# Allegro board Accelerometer_v1.0.brd
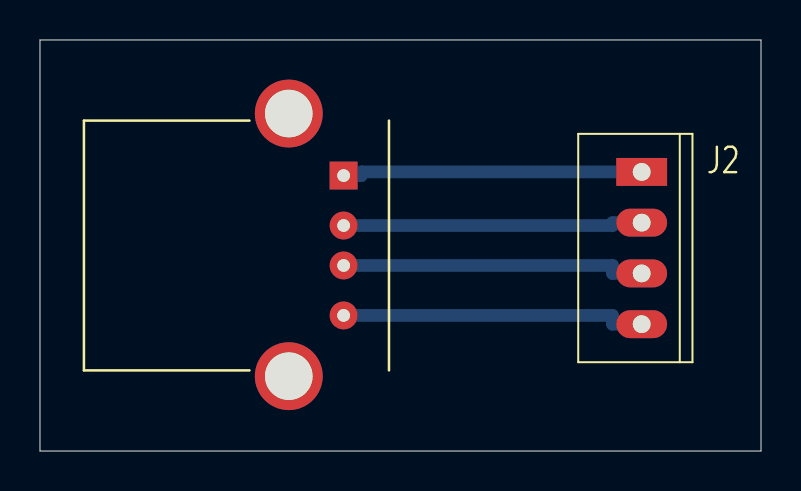
[diagram p0: board, top side]
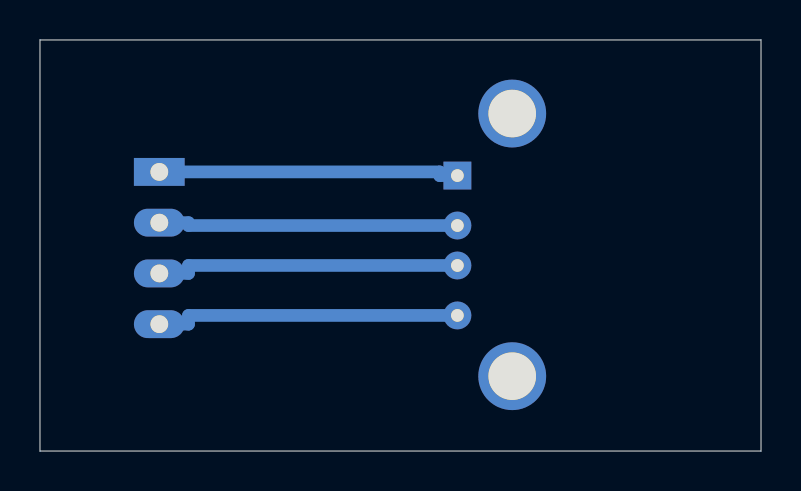
[diagram p1: board, bottom side, seen from below]

Outline 36.07 x 20.57 mm; copper layers: TOP, BOTTOM. Coordinates in mm from the lower left corner of the outline.
Outline path: 0,20.57 0,0 36.07,0 36.07,20.57 0,20.57

## Design rules (mm)
constraint set DEFAULT: min track width 0.127

## Placement (name value [footprint] x y rotation side)
J1  4 HEADER  [USB-A]  14.48 10.29 270 top
J2  4 HEADER  [GU-MOLEX4]  30.1 13.97 0 top

## Library data of the parts
J1 J2 = 4 HEADER

## Footprints (pads in the part's own frame, mm; a bottom-side part is the same pattern mirrored in y, then rotated)
GU-MOLEX4
  rect 2.54x1.397 hole 0.889: 1(0,0)
  oval 2.54x1.397 hole 0.889: 2(0,-2.54) 3(0,-5.08) 4(0,-7.62)
USB-A
  round 3.396 hole 2.38: (-6.604,-2.032) (6.54,-2.032)
  rect 1.397x1.397 hole 0.635: 1(-3.5,0.71)
  round 1.397 hole 0.635: 2(-1,0.71) 3(1,0.71) 4(3.5,0.71)

## Nets
GND: J1.4 J2.4
V3.3: J1.1 J2.1
SCL: J1.3 J2.3
SDA: J1.2 J2.2

## Routing (per net, layer and track width the routed paths; a pad name or vN(x,y) marks a point on that pad's centre or on a via; arc(x,y) is an arc through that point)
GND: length 15.3
  BOTTOM w0.635: J2.4 28.64,6.35 28.64,6.79 J1.4
V3.3: length 15.1
  BOTTOM w0.635: J2.1 16.08,13.97 16.08,13.79 J1.1
SCL: length 15.3
  BOTTOM w0.635: J2.3 28.64,8.89 28.64,9.29 J1.3
SDA: length 15.1
  BOTTOM w0.635: J1.2 28.64,11.29 28.64,11.43 J2.2
